# Altium PCB PCB1.PcbDoc
Units mm, origin at the board's own origin, x right, y up, seen from the top; angles counter-clockwise.
Board outline 16.51 x 32 mm, 2 copper layers (Top Layer, Bottom Layer); 6 components, 9 nets, 170 pads, 32 vias.
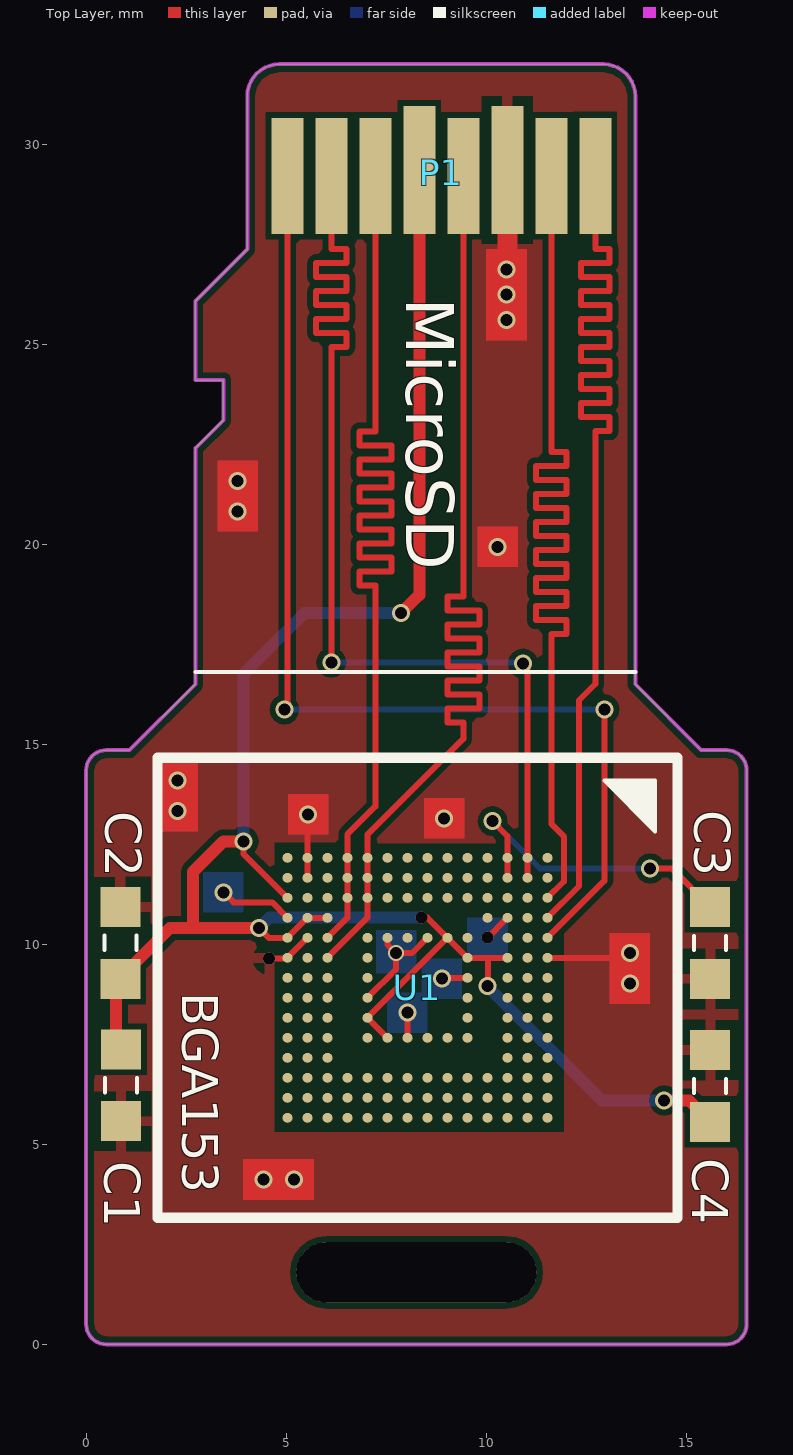
[diagram p0: Top Layer view]
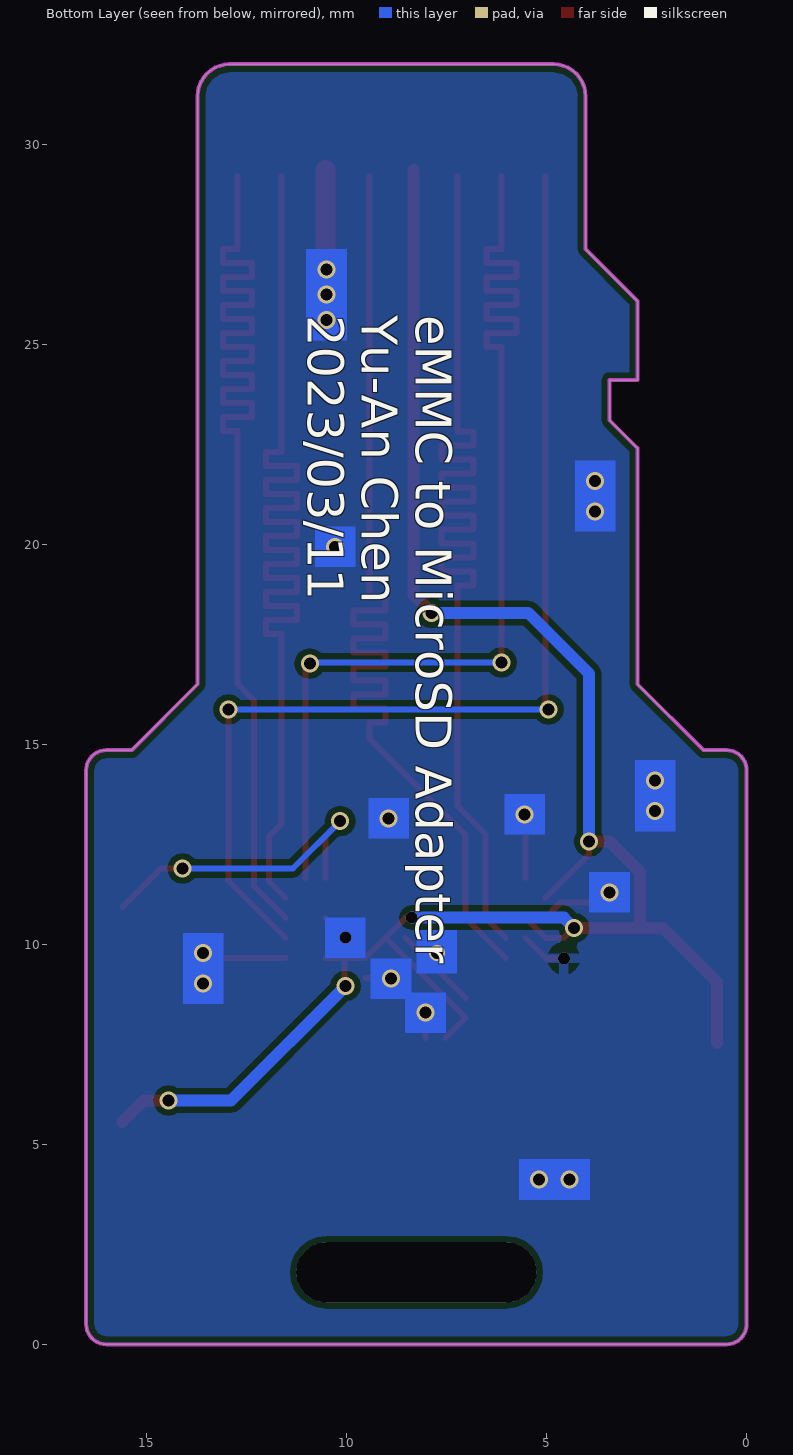
[diagram p1: Bottom Layer view, seen from below]

## Layer stack, top to bottom
Top Solder: solder mask 0.0102, Solder Resist, Dk 3.5
Top Layer: signal copper 0.0356
Dielectric 1: dielectric 0.32, FR-4, Dk 4.8
Bottom Layer: signal copper 0.0356
Bottom Solder: solder mask 0.0102, Solder Resist, Dk 3.5

## Board outline
0,0.508 0,14.351 cw(c0.508,14.351) 0.508,14.859 1.081,14.859 2.726,16.504 2.726,22.404 3.426,23.104 3.426,24.104 2.726,24.104 2.726,26.08 4.026,27.38 4.026,31.204 cw(c4.826,31.204) 4.826,32.004 12.926,32.004 cw(c12.926,31.204) 13.726,31.204 13.726,16.504 15.371,14.859 16.002,14.859 cw(c16.002,14.351) 16.51,14.351 16.51,0.508 cw(c16.002,0.508) 16.002,0 0.508,0 cw(c0.508,0.508)

## Design rules (kind name [scope] priority, off if disabled: settings)
Clearance [All] p1: gap=0.15
PolygonConnect [All] p1: connectstyle=Relief reliefconductorwidth=0.254 reliefentries=4 polygonreliefangle="90 Angle" airgapwidth=0.254
RoutingVias [All] p1: holewidth=0.3 width=0.45 viastyle="Through Hole" minholewidth=0.3 minwidth=0.3 maxholewidth=0.3 maxwidth=0.45
SolderMaskExpansion [All] p1: expansion=0.102
Width [All] p1: maxlimit=0.5 minlimit=0.15 preferedwidth=0.2
30 further rules are at their usual default settings.

## Classes and differential pairs
component class Sheet6: C1 C2 C3 C4 P1

## Components (designator, comment, footprint, x,y, rotation, side; value= is the part's Value field where it differs from the comment)
C1 "4.7uF,0603" C0603 0.873,6.491 r90 top
C2 "0.1uF,0603" C0603 0.855,10.027 r270 top
C3 "0.1uF,0603" C0603 15.6,10.05 r90 top
C4 "0.1uF,0603" C0603 15.6,6.45 r270 top
P1 "MicroSD_Card" MicroSD_Card 5.842,32.004 r0 top
U1 "eMMC" BGA153 8.255,8.89 r270 top

## Footprints (in the part's own frame and the unit in brackets; to place one, negate y for a bottom-side part, rotate by r counter-clockwise, add the part's x,y. Pads: shape width x height; smd on the part's side, far side on the other; paste and mask are expansions set on the pad)
BGA153 [mm]
  round 0.25 smd mask+0.051: A1(-3.275,3.275) A2(-2.775,3.275) A3(-2.275,3.275) A4(-1.775,3.275) A5(-1.275,3.275) A6(-0.775,3.275) A7(-0.275,3.275) A8(0.225,3.275) A9(0.725,3.275) A10(1.225,3.275) A11(1.725,3.275) A12(2.225,3.275) A13(2.725,3.275) A14(3.225,3.275) B1(-3.275,2.775) B2(-2.775,2.775) B3(-2.275,2.775) B4(-1.775,2.775) B5(-1.275,2.775) B6(-0.775,2.775) B7(-0.275,2.775) B8(0.225,2.775) B9(0.725,2.775) B10(1.225,2.775) B11(1.725,2.775) B12(2.225,2.775) B13(2.725,2.775) B14(3.225,2.775) C1(-3.275,2.275) C2(-2.775,2.275) C3(-2.275,2.275) C4(-1.775,2.275) C5(-1.275,2.275) C6(-0.775,2.275) C7(-0.275,2.275) C8(0.225,2.275) C9(0.725,2.275) C10(1.225,2.275) C11(1.725,2.275) C12(2.225,2.275) C13(2.725,2.275) C14(3.225,2.275) D1(-3.275,1.775) D2(-2.775,1.775) D3(-2.275,1.775) D4(-1.775,1.775) D12(2.225,1.775) D13(2.725,1.775) D14(3.225,1.775) E1(-3.275,1.275) E2(-2.775,1.275) E3(-2.275,1.275) E5(-1.275,1.275) E6(-0.775,1.275) E7(-0.275,1.275) E8(0.225,1.275) E9(0.725,1.275) E10(1.225,1.275) E12(2.225,1.275) E13(2.725,1.275) E14(3.225,1.275) F1(-3.275,0.775) F2(-2.775,0.775) F3(-2.275,0.775) F5(-1.275,0.775) F10(1.225,0.775) F12(2.225,0.775) F13(2.725,0.775) F14(3.225,0.775) G1(-3.275,0.275) G2(-2.775,0.275) G3(-2.275,0.275) G5(-1.275,0.275) G10(1.225,0.275) G12(2.225,0.275) G13(2.725,0.275) G14(3.225,0.275) H1(-3.275,-0.225) H2(-2.775,-0.225) H3(-2.275,-0.225) H5(-1.275,-0.225) H10(1.225,-0.225) H12(2.225,-0.225) H13(2.725,-0.225) H14(3.225,-0.225) J1(-3.275,-0.725) J2(-2.775,-0.725) J3(-2.275,-0.725) J5(-1.275,-0.725) J10(1.225,-0.725) J12(2.225,-0.725) J13(2.725,-0.725) J14(3.225,-0.725) K1(-3.275,-1.225) K2(-2.775,-1.225) K3(-2.275,-1.225) K5(-1.275,-1.225) K6(-0.775,-1.225) K7(-0.275,-1.225) K8(0.225,-1.225) K9(0.725,-1.225) K10(1.225,-1.225) K12(2.225,-1.225) K13(2.725,-1.225) K14(3.225,-1.225) L1(-3.275,-1.725) L2(-2.775,-1.725) L3(-2.275,-1.725) L12(2.225,-1.725) L13(2.725,-1.725) L14(3.225,-1.725) M1(-3.275,-2.225) M2(-2.775,-2.225) M3(-2.275,-2.225) M4(-1.775,-2.225) M5(-1.275,-2.225) M6(-0.775,-2.225) M7(-0.275,-2.225) M8(0.225,-2.225) M9(0.725,-2.225) M10(1.225,-2.225) M11(1.725,-2.225) M12(2.225,-2.225) M13(2.725,-2.225) M14(3.225,-2.225) N1(-3.275,-2.725) N2(-2.775,-2.725) N3(-2.275,-2.725) N4(-1.775,-2.725) N5(-1.275,-2.725) N6(-0.775,-2.725) N7(-0.275,-2.725) N8(0.225,-2.725) N9(0.725,-2.725) N10(1.225,-2.725) N11(1.725,-2.725) N12(2.225,-2.725) N13(2.725,-2.725) N14(3.225,-2.725) P1(-3.275,-3.225) P2(-2.775,-3.225) P3(-2.275,-3.225) P4(-1.775,-3.225) P5(-1.275,-3.225) P6(-0.775,-3.225) P7(-0.275,-3.225) P8(0.225,-3.225) P9(0.725,-3.225) P10(1.225,-3.225) P11(1.725,-3.225) P12(2.225,-3.225) P13(2.725,-3.225) P14(3.225,-3.225)
  silkscreen extent -5.78,-6.48 5.72,6.52
C0603 [mm]
  rect 1x1 smd: 01(-0.911,0) 02(0.886,0)
  silkscreen extent -0.19,-0.4 0.17,0.4, body extent -0.81,-0.41 0.81,0.41, height 0.58
MicroSD_Card [mm]
  rect 0.8x2.9 smd: 01(-0.816,-2.793) 02(0.284,-2.793) 03(1.384,-2.793) 05(3.584,-2.793) 07(5.784,-2.793) 08(6.884,-2.793)
  rect 0.8x3.2 smd: 04(2.484,-2.643) 06(4.684,-2.643)
  Keep-Out Layer lines w0.1: -3.116,-15.5 -3.116,-9.6 -2.416,-8.9 -2.416,-7.9 -3.116,-7.9 -3.116,-5.924 -1.816,-4.624 -1.816,-0.8 cw(c-1.016,-0.8) -1.016,0 7.084,0 cw(c7.084,-0.8) 7.884,-0.8 7.884,-15.5
  silkscreen extent -3.12,-15.2 7.88,-15.2

## Part data
C1 C2 C3 C4: library part Cap

## Free pads (board coordinates)
  oval 6x1.5 hole 1.5 slot 6 at 0 deg unplated: 2(8.255,1.8)

## Via types
v1: diameter 0.45, hole 0.3, Top Layer to Bottom Layer, tented both sides, 28 vias
v2: diameter 0.3, hole 0.3, Top Layer to Bottom Layer, tented both sides, 3 vias
v3: diameter 0.4, hole 0.3, Top Layer to Bottom Layer, tented both sides, 1 vias

## Nets (pads, with @x,y where several pads share a name; then routed paths per layer and width w, separated by ;. In a path a pad name is that pad's centre, name@x,y a point inside that pad or via, vN(x,y) a via of type N, cw(c..) or ccw(c..) an arc to the next point about the centre after c; other vN are vias at no path point)
CLK: P1.05 U1.K1 U1.K2 U1.K3 U1.M6 | length 28.2
  Top Layer w0.15: U1.M6 7.03,10.665 U1.K3 U1.K2 U1.K1 7.03,12.745 9.426,15.141 9.426,15.367 9.426,15.542 9.026,15.542 9.026,15.892 9.426,15.892 9.826,15.892 9.826,16.242 9.426,16.242 9.026,16.242 9.026,16.592 9.426,16.592 9.826,16.592 9.826,16.942 9.426,16.942 9.026,16.942 9.026,17.292 9.426,17.292 9.826,17.292 9.826,17.642 9.426,17.642 9.026,17.642 9.026,17.992 9.426,17.992 9.826,17.992 9.826,18.342 9.426,18.342 9.026,18.342 9.026,18.692 9.426,18.692 9.426,22.606 P1.05
CMD: P1.03 U1.L1 U1.L2 U1.L3 U1.M5 | length 28.3
  Top Layer w0.15: U1.M5 6.53,10.665 U1.L3 U1.L2 U1.L1 6.53,12.753 7.226,13.449 7.226,18.796 7.226,18.971 6.826,18.971 6.826,19.321 7.226,19.321 7.626,19.321 7.626,19.671 7.226,19.671 6.826,19.671 6.826,20.021 7.226,20.021 7.626,20.021 7.626,20.371 7.226,20.371 6.826,20.371 6.826,20.721 7.226,20.721 7.626,20.721 7.626,21.071 7.226,21.071 6.826,21.071 6.826,21.421 7.226,21.421 7.626,21.421 7.626,21.771 7.226,21.771 6.826,21.771 6.826,22.121 7.226,22.121 7.626,22.121 7.626,22.471 7.226,22.471 6.826,22.471 6.826,22.821 7.226,22.821 7.226,25.273 P1.03
DAT0: P1.07 U1.A3 | length 28.4
  Top Layer w0.15: U1.A3 11.938,11.574 11.938,12.7 11.626,13.012 11.626,16.129 11.626,17.754 12.012,17.754 12.012,18.104 11.626,18.104 11.24,18.104 11.24,18.454 11.626,18.454 12.012,18.454 12.012,18.804 11.626,18.804 11.24,18.804 11.24,19.154 11.626,19.154 12.012,19.154 12.012,19.504 11.626,19.504 11.24,19.504 11.24,19.854 11.626,19.854 12.012,19.854 12.012,20.204 11.626,20.204 11.24,20.204 11.24,20.554 11.626,20.554 12.012,20.554 12.012,20.904 11.626,20.904 11.24,20.904 11.24,21.254 11.626,21.254 12.012,21.254 12.012,21.604 11.626,21.604 11.24,21.604 11.24,21.954 11.626,21.954 12.012,21.954 12.012,22.304 11.626,22.304 11.626,22.479 P1.07
DAT1: P1.08 U1.A4 | length 28.4
  Top Layer w0.15: U1.A4 12.319,11.455 12.319,16.103 12.726,16.51 12.726,20.955 12.726,22.834 13.085,22.834 13.085,23.184 12.726,23.184 12.367,23.184 12.367,23.534 12.726,23.534 13.085,23.534 13.085,23.884 12.726,23.884 12.367,23.884 12.367,24.234 12.726,24.234 13.085,24.234 13.085,24.584 12.726,24.584 12.367,24.584 12.367,24.934 12.726,24.934 13.085,24.934 13.085,25.284 12.726,25.284 12.367,25.284 12.367,25.634 12.726,25.634 13.085,25.634 13.085,25.984 12.726,25.984 12.367,25.984 12.367,26.334 12.726,26.334 13.085,26.334 13.085,26.684 12.726,26.684 12.367,26.684 12.367,27.034 12.726,27.034 13.085,27.034 13.085,27.384 12.726,27.384 12.726,27.559 P1.08
DAT2: P1.01 U1.A5 | length 27.7
  Top Layer w0.15: v1(4.953,15.875) 5.026,15.948 P1.01 ; U1.A5 12.954,11.59 v1(12.954,15.875)
  Bottom Layer w0.15: v1(4.953,15.875) v1(12.954,15.875)
DAT3: P1.02 U1.B1 U1.B2 | length 27.7
  Top Layer w0.15: v1(6.126,17.048) 6.126,22.225 6.126,24.934 6.504,24.934 6.504,25.284 6.126,25.284 5.748,25.284 5.748,25.634 6.126,25.634 6.504,25.634 6.504,25.984 6.126,25.984 5.748,25.984 5.748,26.334 6.126,26.334 6.504,26.334 6.504,26.684 6.126,26.684 5.748,26.684 5.748,27.034 6.126,27.034 6.504,27.034 6.504,27.384 6.126,27.384 6.126,27.559 P1.02 ; v1(10.922,17.018) 11.03,16.91 U1.B1 U1.B2
  Bottom Layer w0.15: v1(6.126,17.048) 10.892,17.048 v1(10.922,17.018)
GND: C1.01 C2.01 C3.01 C4.01 P1.06 U1.A6 U1.C4 U1.E7 U1.G5 U1.H10 U1.J5 U1.K8 U1.N1 U1.N2 U1.N5 U1.P4 U1.P6 | length 13.3
  Top Layer w0.15: v1(3.429,11.303) 3.683,11.049 4.646,11.049 U1.P4 ; v2(4.572,9.652) 5.016,9.652 U1.P6 U1.N5 ; U1.N2 U1.N1 5.53,12.758 ; U1.K8 7.747,9.383 v3(7.747,9.779) ; U1.J5 7.53,9.996 v3(7.747,9.779) ; U1.H10 v1(8.03,8.292) ; U1.G5 8.143,9.779 v3(7.747,9.779) ; v1(8.89,9.144) 8.911,9.165 U1.E7 ; v2(10.033,10.169) U1.C4 ; U1.A6 13.195,9.665 13.611,9.249
  Top Layer w0.5: 10.526,27.248 P1.06
  other v1: 4.427,4.123 5.189,4.123 13.589,9.017 13.589,9.779 8.95,13.15 5.55,13.25 2.286,13.335 2.286,14.097 10.287,19.939 3.785,20.828 3.785,21.59 10.505,25.607 10.505,26.242 10.505,26.877
NetC3_02: C3.02 U1.C1 U1.C2 | length 7.9
  Top Layer w0.15: v1(10.16,13.081) 10.53,12.711 U1.C2 ; v1(14.1,11.9) 14.636,11.9 C3.02
  Bottom Layer w0.15: v1(10.16,13.081) 11.341,11.9 v1(14.1,11.9)
VCC: C1.02 C2.02 C4.02 P1.04 U1.C6 U1.E6 U1.F5 U1.J10 U1.K9 U1.M4 U1.N4 U1.P3 U1.P5 | length 50.5
  Top Layer w0.15: v1(3.937,12.573) 3.937,12.258 U1.P3 ; v1(4.318,10.414) 4.567,10.165 U1.P5 U1.N4 U1.M4 ; U1.J10 U1.K9 U1.F5 ; v2(8.382,10.668) 8.527,10.668 U1.F5 ; v1(10.03,8.958) 10.05,8.979 10.05,9.665 ; U1.C6 10.05,9.665 ; U1.F5 U1.E6 10.05,9.665
  Top Layer w0.3: C1.02@0.746,7.534 0.746,9.064 2.096,10.414 v1(4.318,10.414) ; 2.667,10.414 2.667,11.811 3.429,12.573 v1(3.937,12.573) ; v1(7.874,18.288) 8.326,18.74 P1.04 ; v1(14.45,6.1) 15.064,6.1 C4.02
  Bottom Layer w0.3: v1(3.937,12.573) 3.937,16.764 5.461,18.288 v1(7.874,18.288) ; v1(4.318,10.414) 4.572,10.668 v2(8.382,10.668) ; v1(10.03,8.958) 12.888,6.1 v1(14.45,6.1)
pads on no net: U1.A1 U1.A2 U1.A7 U1.A8 U1.A9 U1.A10 U1.A11 U1.A12 U1.A13 U1.A14 U1.B3 U1.B4 U1.B5 U1.B6 U1.B7 U1.B8 U1.B9 U1.B10 U1.B11 U1.B12 U1.B13 U1.B14 U1.C3 U1.C5 U1.C7 U1.C8 U1.C9 U1.C10 U1.C11 U1.C12 U1.C13 U1.C14 U1.D1 U1.D2 U1.D3 U1.D4 U1.D12 U1.D13 U1.D14 U1.E1 U1.E2 U1.E3 U1.E5 U1.E8 U1.E9 U1.E10 U1.E12 U1.E13 U1.E14 U1.F1 U1.F2 U1.F3 U1.F10 U1.F12 U1.F13 U1.F14 U1.G1 U1.G2 U1.G3 U1.G10 U1.G12 U1.G13 U1.G14 U1.H1 U1.H2 U1.H3 U1.H5 U1.H12 U1.H13 U1.H14 U1.J1 U1.J2 U1.J3 U1.J12 U1.J13 U1.J14 U1.K5 U1.K6 U1.K7 U1.K10 U1.K12 U1.K13 U1.K14 U1.L12 U1.L13 U1.L14 U1.M1 U1.M2 U1.M3 U1.M7 U1.M8 U1.M9 U1.M10 U1.M11 U1.M12 U1.M13 U1.M14 U1.N3 U1.N6 U1.N7 U1.N8 U1.N9 U1.N10 U1.N11 U1.N12 U1.N13 U1.N14 U1.P1 U1.P2 U1.P7 U1.P8 U1.P9 U1.P10 U1.P11 U1.P12 U1.P13 U1.P14

## Polygon pours and split planes (outlines as drawn)
GND on Bottom Layer "BOT" (solid, remove dead copper, pour order 4): 2.159,33.02 2.794,32.385 17.145,32.385 17.145,0.635 18.034,-0.254 -1.778,-0.254 -1.778,15.113 -0.762,16.129
GND on Top Layer "TOP" (solid, remove dead copper, pour order 6): 3.175,33.02 3.302,33.147 14.478,33.147 14.478,17.78 14.986,17.272 17.018,15.24 17.526,15.24 17.526,-1.016 16.764,-1.778 16.256,-1.27 -0.762,-1.27 -0.762,14.859 -0.762,15.24 1.397,17.78 1.397,30.226 2.413,31.242

## Keep-outs
Keep-Out Layer:
  lines w0.1: 2.726,16.504 1.081,14.859 0.508,14.859 ccw(c0.508,14.351) 0,14.351 0,2.032 0,0.508 ccw(c0.508,0.508) 0.508,0 16.002,0 ccw(c16.002,0.508) 16.51,0.508 16.51,14.351 ccw(c16.002,14.351) 16.002,14.859 15.371,14.859 13.726,16.504

## Other copper
Top Layer:
  rectangle net GND: 5.042,12.742 6.058,13.758
  rectangle net GND: 9.997,26.369 11.013,27.385
  rectangle net GND: 9.997,25.734 11.013,26.75
  rectangle net GND: 9.997,25.099 11.013,26.115
  rectangle net GND: 13.081,9.271 14.097,10.287
  rectangle net GND: 13.081,8.509 14.097,9.525
  rectangle net GND: 1.778,13.589 2.794,14.605
  rectangle net GND: 3.277,20.32 4.293,21.336
  rectangle net GND: 3.277,21.082 4.293,22.098
  region net GND: 5.697,3.615 5.697,4.631 4.681,4.631 4.681,3.615
  region net GND: 4.935,3.615 4.935,4.631 3.919,4.631 3.919,3.615
  rectangle net GND: 9.779,19.431 10.795,20.447
  rectangle net GND: 1.778,12.827 2.794,13.843
  rectangle net GND: 8.442,12.642 9.458,13.658
  pour cut-out: 4.7,12.55 4.7,5.3 11.95,5.3 11.95,12.488 11.938,12.5
Bottom Layer:
  rectangle net GND: 5.042,12.742 6.058,13.758
  rectangle net GND: 9.997,26.369 11.013,27.385
  rectangle net GND: 9.997,25.734 11.013,26.75
  rectangle net GND: 9.997,25.099 11.013,26.115
  rectangle net GND: 13.081,9.271 14.097,10.287
  rectangle net GND: 13.081,8.509 14.097,9.525
  rectangle net GND: 1.778,13.589 2.794,14.605
  rectangle net GND: 3.277,20.32 4.293,21.336
  rectangle net GND: 3.277,21.082 4.293,22.098
  region net GND: 5.697,3.615 5.697,4.631 4.681,4.631 4.681,3.615
  region net GND: 4.935,3.615 4.935,4.631 3.919,4.631 3.919,3.615
  rectangle net GND: 9.779,19.431 10.795,20.447
  rectangle net GND: 9.525,9.661 10.541,10.677
  rectangle net GND: 8.382,8.636 9.398,9.652
  rectangle net GND: 7.522,7.784 8.538,8.8
  rectangle net GND: 7.239,9.271 8.255,10.362
  rectangle net GND: 2.921,10.795 3.937,11.811
  rectangle net GND: 1.778,12.827 2.794,13.843
  rectangle net GND: 8.442,12.642 9.458,13.658

## Silkscreen, mask and mechanical layers (free items; w line width, h text height)
Top Overlay:
  text "MicroSD" at 8.001,26.162 h1.2 r270
  text "BGA153" at 2.4,8.8 h0.9 r270
Bottom Overlay:
  text "eMMC to MicroSD Adapter / Yu-An Chen / 2023/03/11" at 10.968,25.734 h0.9 r90